# EAGLE board Openbook board (EAGLE 9.7.0)
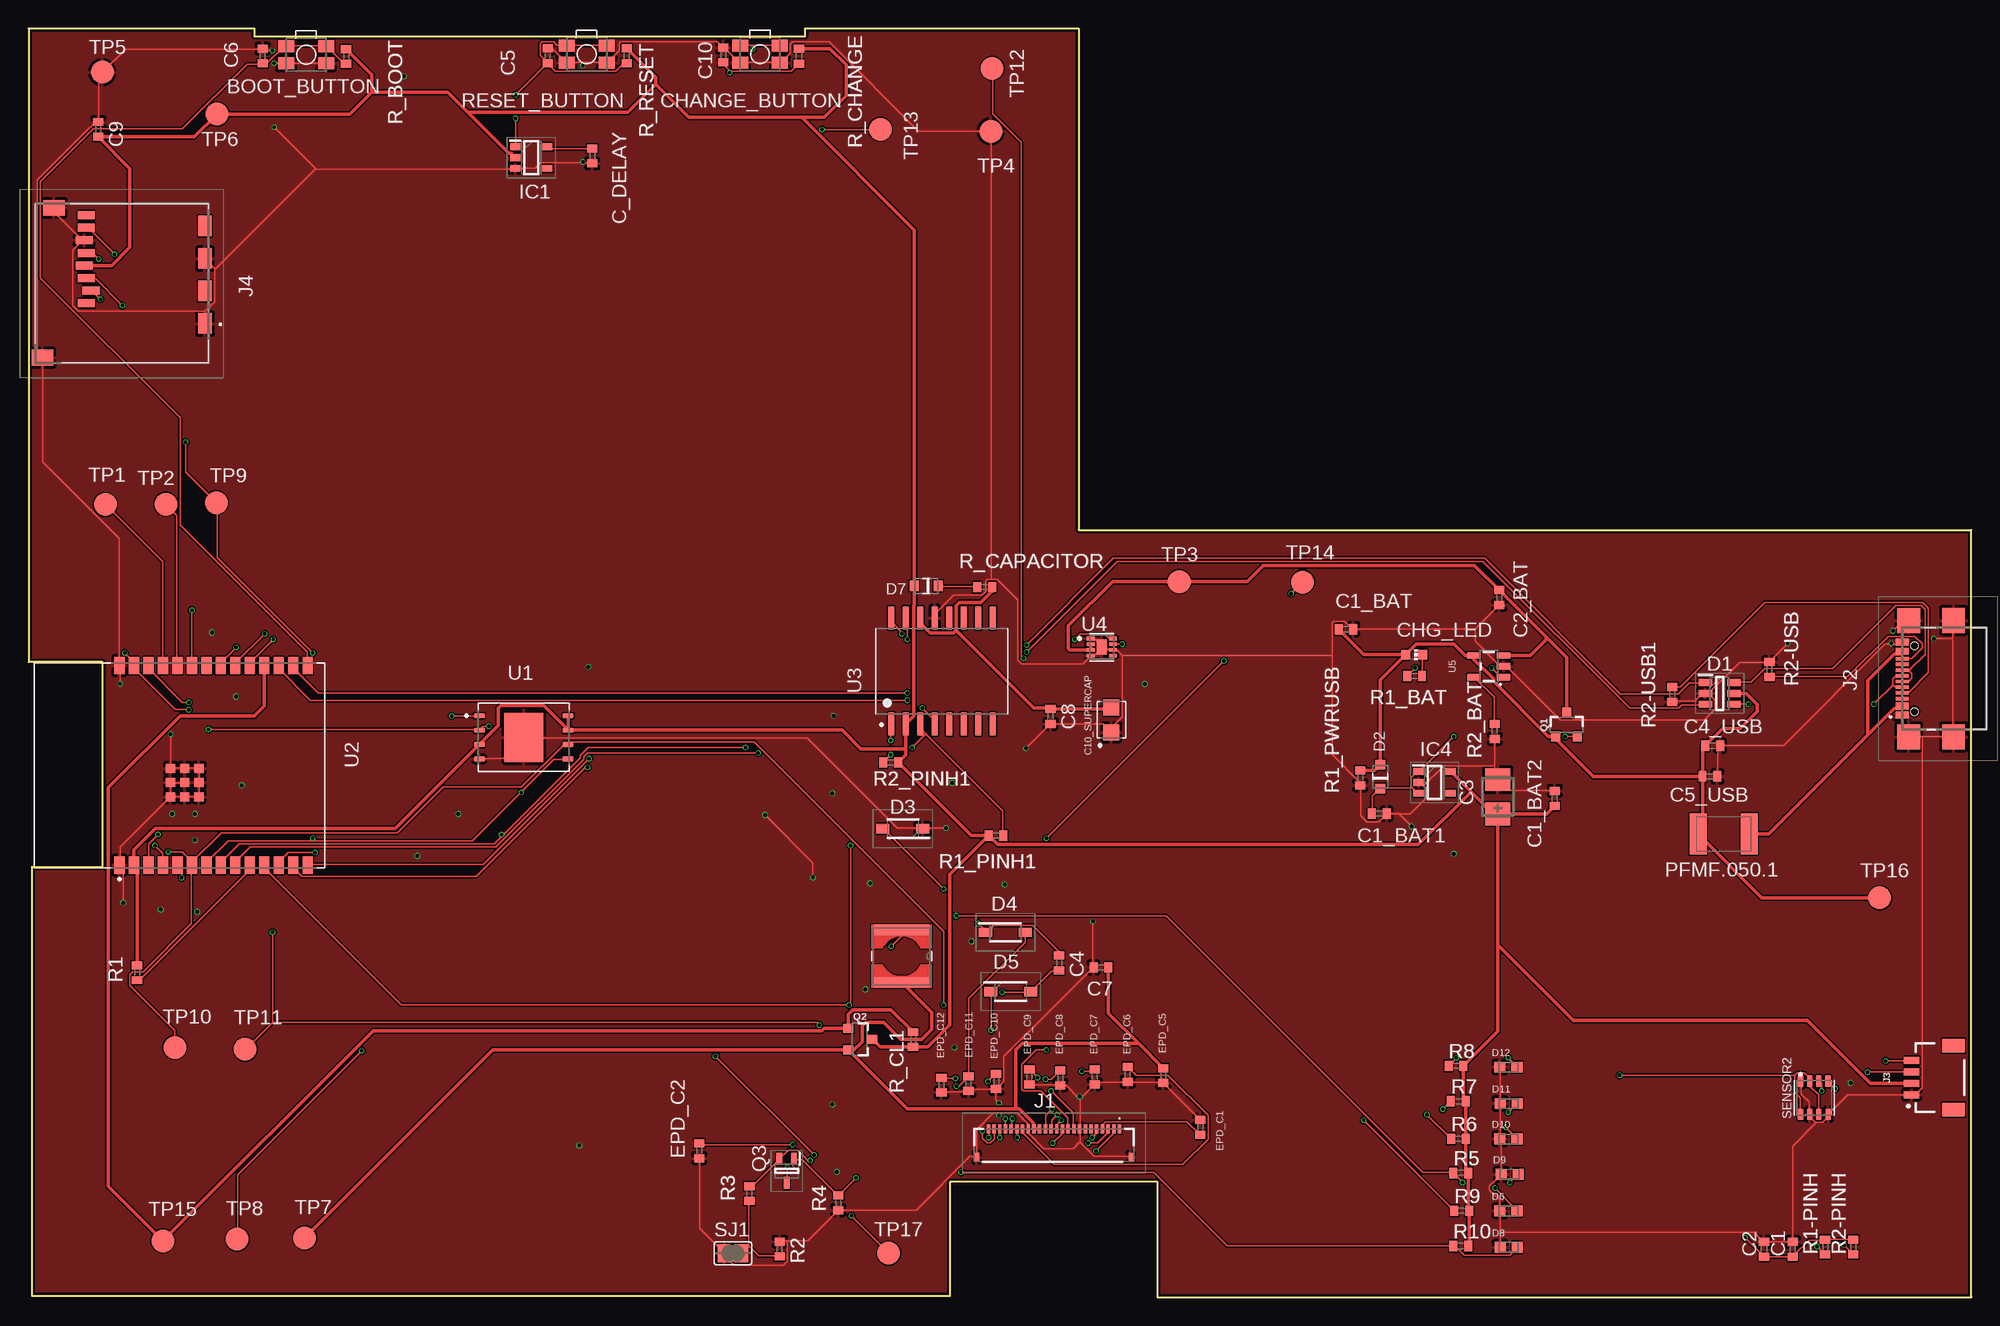
[diagram p0: board, top side]
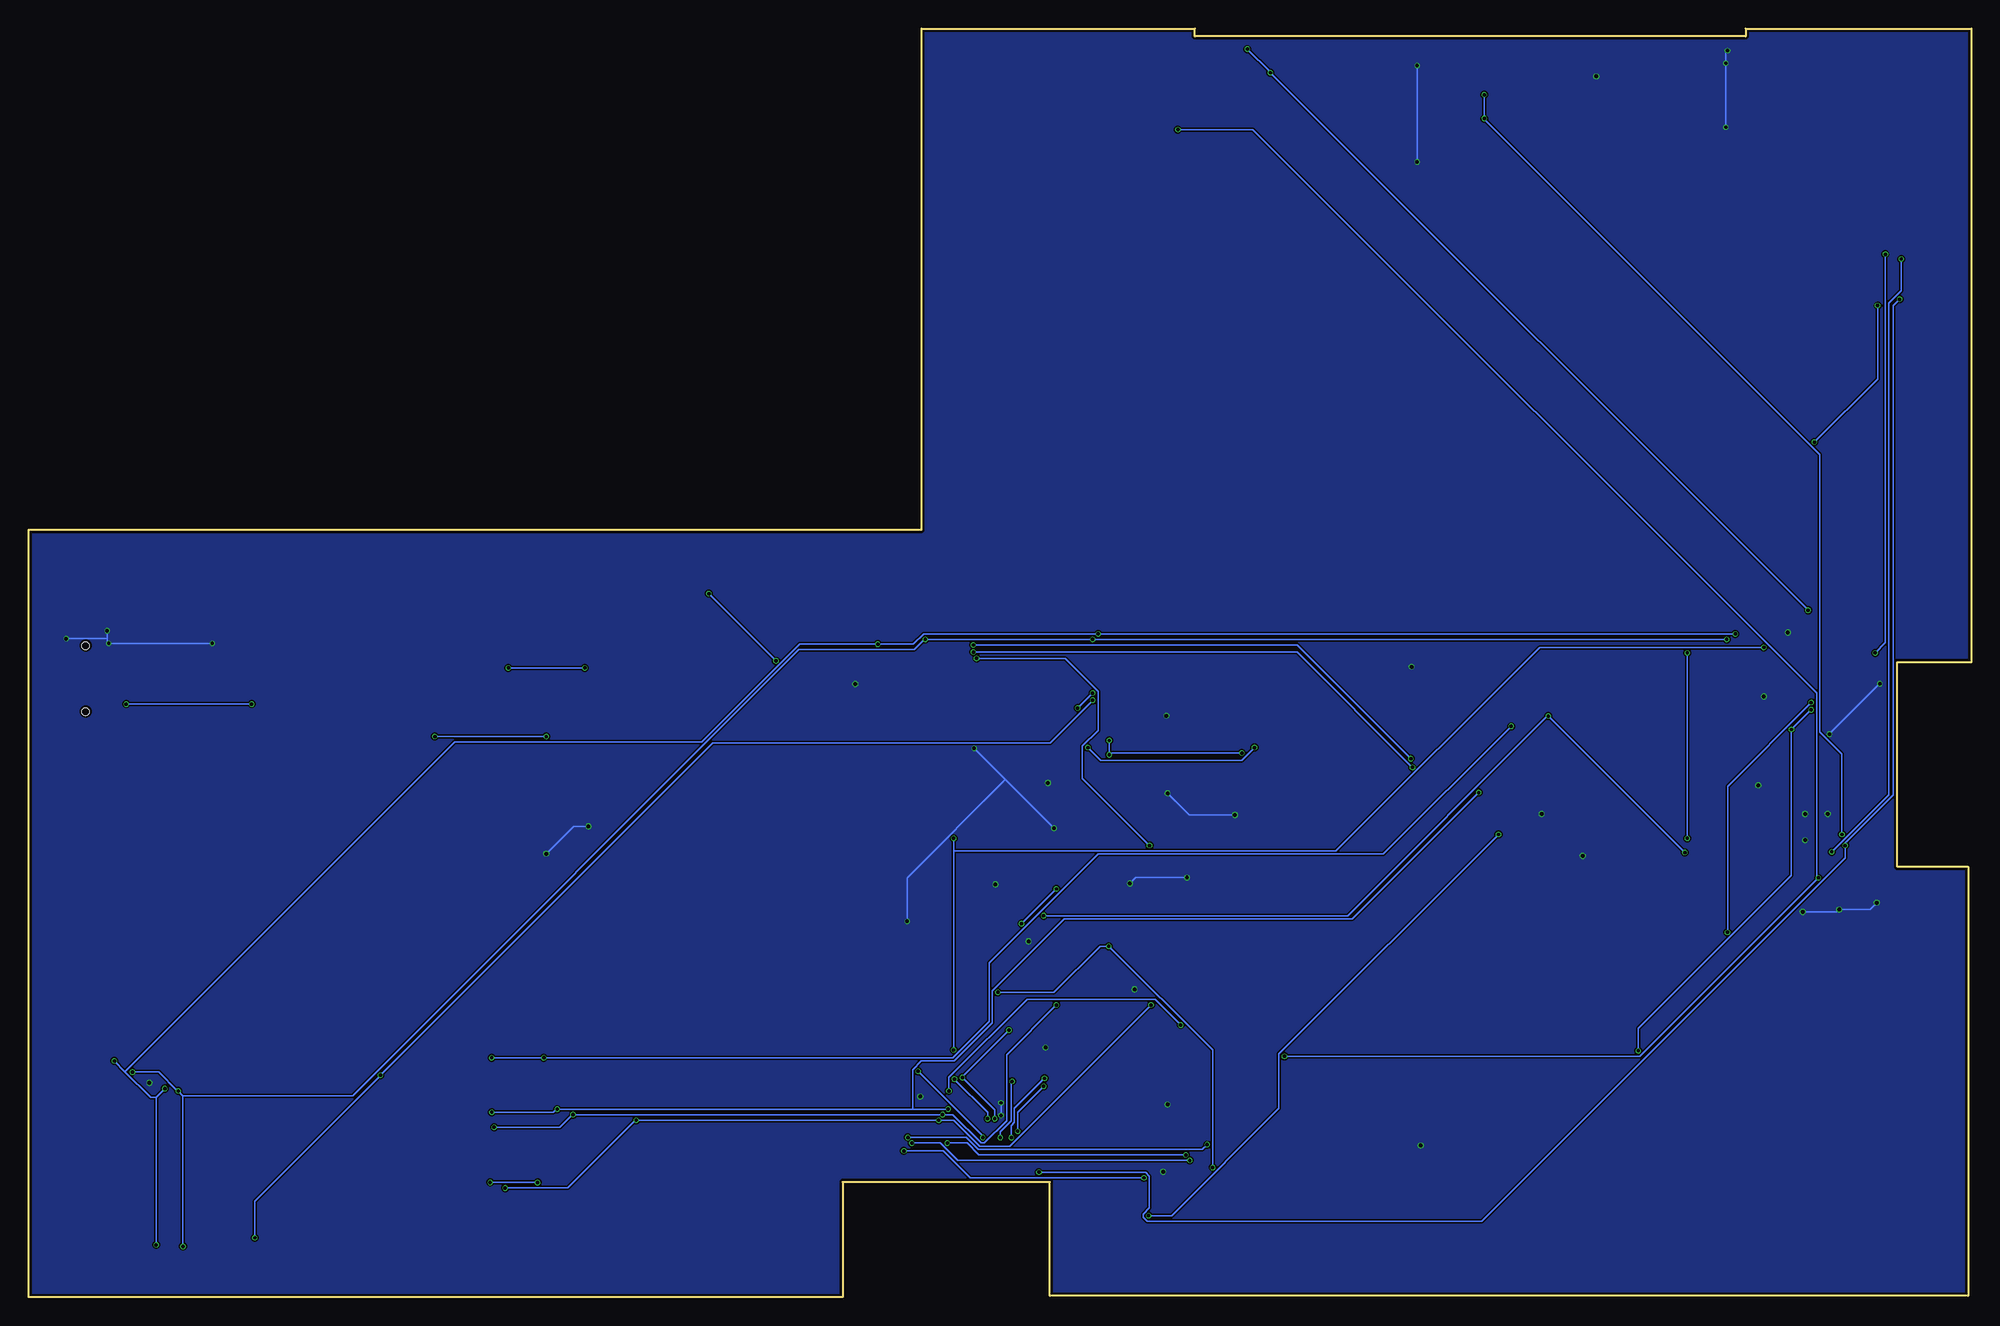
[diagram p1: board, bottom side, seen from below]

Size 170.4 x 111.3 mm. Coordinates in mm from the lower left corner, seen from the top.
Outline: 0.3,0.1 80.83,0.1 80.83,10.1 99,10.1 99,0 170.4,0 170.4,67.3 92.1,67.3 92.1,111.3 68.1,111.3 68.1,110.6 19.8,110.6 19.8,111.3 0,111.3 0,55.7 6.5,55.7 6.5,37.74 0.3,37.74 0.3,0.1
Copper layers (1*16): Top 0.035mm / dielectric 1.6mm / Bottom 0.035mm
Design rules "jlcpcb-2layers.dru": minimum track width 5mil, minimum drill 0.3mm, track to track 5mil, track to pad 5mil, pad to pad 5mil, via to via 5mil, smd to smd 5mil, copper to edge 0.2mm, drill to drill 6mil, minimum pad ring 10mil, minimum via ring 3mil, stop-mask expansion 4mil, vias tented up to drill 0mil, thermal gap 10mil
Net classes: 0 default: width 0.15 mm; 1 POWER: width 0.3 mm

## Footprints (pad centres in the part's own frame; a part is rotated, then mirrored left to right if it is on the bottom)
MYBUTTON = smd 1.4 x 1.05: 1 1.75,0.75; 2 -1.75,0.75; 3 -1.75,-0.75; 4 1.75,-0.75
EAGLE-LTSPICE_C0402 = smd 0.7 x 0.9: 1 -0.65,0; 2 0.65,0
ESP32_WROVER_EAGLE-LTSPICE_C0402 = smd 0.7 x 0.9: 1 -0.65,0; 2 0.65,0
RCL_CT3528 = smd 2 x 2.2: + -1.5,0; - 1.5,0
CAPCP3225X100N = smd 1.4 x 1.4: 1 -1.1,0; 2 1.1,0
ADAFRUIT_CHIP-LED0603 = smd 0.8 x 0.8: A 0,-0.75; C 0,0.75
SOT95P280X145-6N = smd 1.2 x 0.6: 1 -1.25,0.95; 2 -1.25,0; 3 -1.25,-0.95; 4 1.25,-0.95; 5 1.25,0; 6 1.25,0.95
ESP32_WROVER_AVX---SD0805S020S1R0_AVX_SD0805S020S1R0_0 = smd 0.8 x 0.9: 1 -1.05,0; 2 1.05,0
SOD3716X135N = smd 1.15 x 0.8: 1 -1.75,0; 2 1.75,0
DIOC1608X36N = smd 0.97 x 0.94: 1 -0.75,0; 2 0.75,0
SOT95P280X125-5N = smd 0.9 x 0.6: 1 -1.4,0.95; 2 -1.4,0; 3 -1.4,-0.95; 4 1.4,-0.95; 5 1.4,0.95
SOT95P280X120-5N = smd 0.9 x 0.6: 1 -1.4,0.95; 2 -1.4,0; 3 -1.4,-0.95; 4 1.4,-0.95; 5 1.4,0.95
FH34SRJ24S05SH99 = smd 0.3 x 0.8: 1 5.75,1.45; 2 5.25,1.45; 3 4.75,1.45; 4 4.25,1.45; 5 3.75,1.45; 6 3.25,1.45; 7 2.75,1.45; 8 2.25,1.45; 9 1.75,1.45; 10 1.25,1.45; 11 0.75,1.45; 12 0.25,1.45; 13 -0.25,1.45; 14 -0.75,1.45; 15 -1.25,1.45; 16 -1.75,1.45; 17 -2.25,1.45; 18 -2.75,1.45; 19 -3.25,1.45; 20 -3.75,1.45; 21 -4.25,1.45; 22 -4.75,1.45; 23 -5.25,1.45; 24 -5.75,1.45 | smd 0.4 x 0.8: MP1 6.75,-1.05; MP2 -6.75,-1.05
SAMACSYS_PARTS_USB4110GFA = smd 0.3 x 1.15: A1 -3.35,3.678; A4 -2.55,3.678; A5 -1.25,3.678; A6 -0.25,3.678; A7 0.25,3.678; A8 1.25,3.678; A9 2.55,3.678; A12 3.35,3.678; B1 3.05,3.678; B4 2.25,3.678; B5 1.75,3.678; B6 0.75,3.678; B7 -0.75,3.678; B8 -1.75,3.678; B9 -2.25,3.678; B12 -3.05,3.678 | smd 2.18 x 2: MP1 -5.11,-0.827; MP2 5.11,-0.827; MP3 -5.11,3.103; MP4 5.11,3.103 | hole 0.65: -2.89,2.603; 2.89,2.603
JST04_1MM_RA = smd 0.6 x 1.35: 1 -1.5,0; 2 -0.5,0; 3 0.5,0; 4 1.5,0 | smd 1.2 x 2: NC1 2.8,-3.675; NC2 -2.8,-3.675
112ATAARR03ATTEND = smd 1.8 x 1.2: G1 10.6,10.4; G2 4.9,10.4; S1 7.75,10.4; S2 2.05,10.4 | smd 1.4 x 1.9: G3 13.6,-3.85; G4 0.45,-2.85 | smd 0.7 x 1.5: P1 8.8,0; P2 7.7,0.4; P3 6.6,0; P4 5.5,-0.2; P5 4.4,0; P6 3.3,-0.2; P7 2.2,0; P8 1.1,0
IND_4828-WE-TPC_WRE = smd 0.889 x 4.826: 1 -2.286,0; 2 2.286,0
ESP32C6_VARISTOR_CT/CN1812 = smd 1.5 x 3.6: 1 -2.25,0; 2 2.25,0
ESP32_WROVER_SPARKFUN-DISCRETESEMI_SOT23-3 = smd 0.8 x 0.9: 1 -0.95,-1; 2 0.95,-1; 3 0,1.1
SOT65P210X110-3N = smd 1.05 x 0.5: 1 -1.05,0.65; 2 -1.05,-0.65; 3 1.05,0
ESP32_WROVER_EAGLE-LTSPICE_R0402 = smd 0.7 x 0.9: 1 -0.65,0; 2 0.65,0
ESP32_WROVER_BME680_PSON80P300X300X100-8N = smd 1.016 x 0.5: 1 1.458,1.2; 2 1.458,0.4; 3 1.458,-0.4; 4 1.458,-1.2; 5 -1.458,-1.22; 6 -1.458,-0.4; 7 -1.458,0.4; 8 -1.458,1.2
SJ = smd 1.168 x 1.6: 1 -0.762,0; 2 0.762,0
TP20R = smd 2 x 2: TP 0,0
SON127P600X800X80-9N = smd 0.94 x 0.44: 1 -3.895,1.905; 2 -3.895,0.635; 3 -3.895,-0.635; 4 -3.895,-1.905; 5 3.895,-1.905; 6 3.895,-0.635; 7 3.895,0.635; 8 3.895,1.905 | smd 3.4 x 4.3: 9 0,0
XCVR_ESP32-C6-WROOM-1-N8 = smd 1.5 x 0.9: 1 -8.75,5.26; 2 -8.75,3.99; 3 -8.75,2.72; 4 -8.75,1.45; 5 -8.75,0.18; 6 -8.75,-1.09; 7 -8.75,-2.36; 8 -8.75,-3.63; 9 -8.75,-4.9; 10 -8.75,-6.17; 11 -8.75,-7.44; 12 -8.75,-8.71; 13 -8.75,-9.98; 14 -8.75,-11.25; 15 8.75,-11.25; 16 8.75,-9.98; 17 8.75,-8.71; 18 8.75,-7.44; 19 8.75,-6.17; 20 8.75,-4.9; 21 8.75,-3.63; 22 8.75,-2.36; 23 8.75,-1.09; 24 8.75,0.18; 25 8.75,1.45; 26 8.75,2.72; 27 8.75,3.99; 28 8.75,5.26 | smd 0.8 x 0.8: 29_1 -2.755,0.79; 29_2 -1.505,0.79; 29_3 -0.255,0.79; 29_4 -2.755,-0.46; 29_5 -1.505,-0.46; 29_6 -0.255,-0.46; 29_7 -2.755,-1.71; 29_8 -1.505,-1.71; 29_9 -0.255,-1.71
SOIC127P1032X265-16N = smd 2.05 x 0.59: 1 -4.655,4.445; 2 -4.655,3.175; 3 -4.655,1.905; 4 -4.655,0.635; 5 -4.655,-0.635; 6 -4.655,-1.905; 7 -4.655,-3.175; 8 -4.655,-4.445; 9 4.655,-4.445; 10 4.655,-3.175; 11 4.655,-1.905; 12 4.655,-0.635; 13 4.655,0.635; 14 4.655,1.905; 15 4.655,3.175; 16 4.655,4.445
SON50P200X200X80-9N = smd 0.762 x 0.305: 1 -0.985,0.75; 2 -0.985,0.25; 3 -0.985,-0.25; 4 -0.985,-0.75; 5 0.985,-0.75; 6 0.985,-0.25; 7 0.985,0.25; 8 0.985,0.75 | smd 0.9 x 1.3: 9 0,0
ESP32_WROVER_SPARKFUN-IC-POWER_SOT23-5 = smd 0.55 x 1.2: 1 -0.95,-1.3; 2 0,-1.3; 3 0.95,-1.3; 4 0.95,1.3; 5 -0.95,1.3

## Placement (x,y rotation side)
BOOT_BUTTON  BUTTON_CUSYOMV1  [MYBUTTON]  24.35,108.99 180 top
C1  100nF  [EAGLE-LTSPICE_C0402]  154.72,4.2 90 top
C1_BAT  4.7uF  [EAGLE-LTSPICE_C0402]  115.54,58.59 0 top
C1_BAT1  4.7uF  [ESP32_WROVER_EAGLE-LTSPICE_C0402]  118.46,42.42 0 top
C1_BAT2  4.7uF  [EAGLE-LTSPICE_C0402]  133.86,43.76 90 top
C2  100nF  [EAGLE-LTSPICE_C0402]  152.2,4.2 90 top
C2_BAT  4.7uF  [EAGLE-LTSPICE_C0402]  128.99,61.37 270 top
C3  100uF TANT  [RCL_CT3528]  128.86,43.9 90 top
C4  4.7uF/25V  [EAGLE-LTSPICE_C0402]  90.38,29.32 270 top
C4_USB  100nF  [EAGLE-LTSPICE_C0402]  147.7,48.38 0 top
C5  1uF  [EAGLE-LTSPICE_C0402]  45.53,108.9 90 top
C5_USB  4.7uF  [EAGLE-LTSPICE_C0402]  147.46,45.69 0 top
C6  100nF  [EAGLE-LTSPICE_C0402]  20.55,108.88 90 top
C7  10uF  [EAGLE-LTSPICE_C0402]  94.06,28.92 180 top
C8  100nF  [EAGLE-LTSPICE_C0402]  89.63,50.95 270 top
C9  100nF  [EAGLE-LTSPICE_C0402]  6.11,102.45 270 top
C10  100nF  [EAGLE-LTSPICE_C0402]  60.93,108.98 90 top
C10_SUPERCAP  CPH3225A  [CAPCP3225X100N]  94.96,50.65 90 top
C_DELAY  100nF  [EAGLE-LTSPICE_C0402]  49.45,100.12 270 top
CHANGE_BUTTON  BUTTON_CUSYOMV1  [MYBUTTON]  64.15,109.05 180 top
CHG_LED  [ADAFRUIT_CHIP-LED0603]  121.52,56.36 270 top
D1  USBLC6-2SC6Y  [SOT95P280X145-6N]  148.32,52.96 0 top
D2  ESP32_WROVER_AVX---SD0805S020S1R0_AVX_SD0805S020S1R0_0_0AVX_SD0805S020S1R0_0_0  [ESP32_WROVER_AVX---SD0805S020S1R0_AVX_SD0805S020S1R0_0]  118.55,45.66 90 top
D3  MBR0530  [SOD3716X135N]  76.68,41.1 180 top
D4  MBR0530  [SOD3716X135N]  85.68,32 0 top
D5  MBR0530  [SOD3716X135N]  86.14,26.8 0 top
D6  PGB1010603MR  [DIOC1608X36N]  129.79,7.57 0 top
D7  ESP32_WROVER_AVX---SD0805S020S1R0_AVX_SD0805S020S1R0_0_0AVX_SD0805S020S1R0_0_0  [ESP32_WROVER_AVX---SD0805S020S1R0_AVX_SD0805S020S1R0_0]  78.73,62.4 180 top
D8  PGB1010603MR  [DIOC1608X36N]  129.81,4.37 0 top
D9  PGB1010603MR  [DIOC1608X36N]  129.91,10.78 0 top
D10  PGB1010603MR  [DIOC1608X36N]  129.79,13.88 0 top
D11  PGB1010603MR  [DIOC1608X36N]  129.81,16.99 0 top
D12  PGB1010603MR  [DIOC1608X36N]  129.79,20.19 0 top
EPD_C1  1uF/50V  [EAGLE-LTSPICE_C0402]  102.76,14.9 270 top
EPD_C2  1uF/50V  [EAGLE-LTSPICE_C0402]  58.82,12.84 90 top
EPD_C5  0.1uF/50V  [EAGLE-LTSPICE_C0402]  99.52,19.43 90 top
EPD_C6  1uF/50V  [EAGLE-LTSPICE_C0402]  96.4,19.54 90 top
EPD_C7  1uF/50V  [EAGLE-LTSPICE_C0402]  93.5,19.33 90 top
EPD_C8  1uF/50V  [EAGLE-LTSPICE_C0402]  90.48,19.24 90 top
EPD_C9  1uF/50V  [EAGLE-LTSPICE_C0402]  87.78,19.33 90 top
EPD_C10  1uF/50V  [EAGLE-LTSPICE_C0402]  84.86,18.94 90 top
EPD_C11  1uF/50V  [EAGLE-LTSPICE_C0402]  82.44,18.74 90 top
EPD_C12  1uF/50V  [EAGLE-LTSPICE_C0402]  80.06,18.6 90 top
IC1  BD5229G-TR  [SOT95P280X125-5N]  44.09,99.97 0 top
IC4  XC6220A331MR-G  [SOT95P280X120-5N]  123.31,45.16 0 top
J1  FH34SRJ-24S-0.5SH_99_  [FH34SRJ24S05SH99]  89.93,13.32 0 top
J2  SAMACSYS_PARTS_USB4110-GF-A  [SAMACSYS_PARTS_USB4110GFA]  168,54.26 90 top
J3  QWIIC_RIGHT_ANGLE  [JST04_1MM_RA]  165.15,19.26 90 top
J4  112A-TAAR-R03_ATTEND  [112ATAARR03ATTEND]  5.08,96.01 270 top
L1  68uH  [IND_4828-WE-TPC_WRE]  76.57,29.91 270 top
PFMF.050.1  ESP32C6_VARISTORCN1812  [ESP32C6_VARISTOR_CT/CN1812]  148.67,40.63 180 top
Q1  20V/4.2A/52mΩ/1.4W  [ESP32_WROVER_SPARKFUN-DISCRETESEMI_SOT23-3]  134.89,50.19 0 top
Q2  20V/4.2A/52mΩ/1.4W  [ESP32_WROVER_SPARKFUN-DISCRETESEMI_SOT23-3]  72.9,22.63 270 top
Q3  SI1308EDL-T1-GE3  [SOT65P210X110-3N]  66.49,11.07 270 top
R1  10K  [ESP32_WROVER_EAGLE-LTSPICE_R0402]  9.52,28.46 90 top
R1-PINH  10K  [ESP32_WROVER_EAGLE-LTSPICE_R0402]  157.56,4.4 90 top
R1_BAT  200  [ESP32_WROVER_EAGLE-LTSPICE_R0402]  121.56,54.49 180 top
R1_PINH1  10K  [ESP32_WROVER_EAGLE-LTSPICE_R0402]  84.85,40.49 180 top
R1_PWRUSB  100K  [ESP32_WROVER_EAGLE-LTSPICE_R0402]  116.8,45.56 90 top
R2  2.2  [ESP32_WROVER_EAGLE-LTSPICE_R0402]  65.89,4.22 270 top
R2-PINH  10K  [ESP32_WROVER_EAGLE-LTSPICE_R0402]  160.04,4.4 90 top
R2-USB  5k1  [ESP32_WROVER_EAGLE-LTSPICE_R0402]  152.68,55.06 90 top
R2-USB1  5K1  [ESP32_WROVER_EAGLE-LTSPICE_R0402]  144.15,52.88 90 top
R2_BAT  2K  [ESP32_WROVER_EAGLE-LTSPICE_R0402]  128.59,49.63 90 top
R2_PINH1  10K  [ESP32_WROVER_EAGLE-LTSPICE_R0402]  75.61,46.91 0 top
R3  0.47  [ESP32_WROVER_EAGLE-LTSPICE_R0402]  63.22,9.09 90 top
R4  10K  [ESP32_WROVER_EAGLE-LTSPICE_R0402]  71.02,8.27 90 top
R5  10k  [ESP32_WROVER_EAGLE-LTSPICE_R0402]  125.62,10.89 0 top
R6  10k  [ESP32_WROVER_EAGLE-LTSPICE_R0402]  125.41,13.89 0 top
R7  10k  [ESP32_WROVER_EAGLE-LTSPICE_R0402]  125.4,17.19 0 top
R8  10k  [ESP32_WROVER_EAGLE-LTSPICE_R0402]  125.19,20.29 0 top
R9  10k  [ESP32_WROVER_EAGLE-LTSPICE_R0402]  125.69,7.58 0 top
R10  10k  [ESP32_WROVER_EAGLE-LTSPICE_R0402]  125.6,4.48 0 top
R_BOOT  10K  [ESP32_WROVER_EAGLE-LTSPICE_R0402]  27.85,108.84 90 top
R_CAPACITOR  15  [ESP32_WROVER_EAGLE-LTSPICE_R0402]  83.85,62.29 0 top
R_CHANGE  10K  [ESP32_WROVER_EAGLE-LTSPICE_R0402]  67.57,108.88 90 top
R_CL1  10K  [ESP32_WROVER_EAGLE-LTSPICE_R0402]  77.58,22.6 270 top
R_RESET  10K  [ESP32_WROVER_EAGLE-LTSPICE_R0402]  52.47,108.91 90 top
RESET_BUTTON  BUTTON_CUSYOMV1  [MYBUTTON]  48.95,109.05 180 top
SENSOR2  BME688  [ESP32_WROVER_BME680_PSON80P300X300X100-8N]  156.61,17.5 90 top
SJ1  [SJ]  61.78,3.84 0 top
TP1  TPTP20R  [TP20R]  6.74,69.55 0 top
TP2  TPTP20R  [TP20R]  12.04,69.57 0 top
TP3  TPTP20R  [TP20R]  100.92,62.77 0 top
TP4  TPTP20R  [TP20R]  84.4,102.27 0 top
TP5  TPTP20R  [TP20R]  6.48,107.47 0 top
TP6  TPTP20R  [TP20R]  16.54,103.79 0 top
TP7  TPTP20R  [TP20R]  24.22,5.19 0 top
TP8  TPTP20R  [TP20R]  18.3,5.09 0 top
TP9  TPTP20R  [TP20R]  16.48,69.69 0 top
TP10  TPTP20R  [TP20R]  12.84,21.91 0 top
TP11  TPTP20R  [TP20R]  18.99,21.75 0 top
TP12  TPTP20R  [TP20R]  84.51,107.81 270 top
TP13  TPTP20R  [TP20R]  74.71,102.46 270 top
TP14  TPTP20R  [TP20R]  111.74,62.73 0 top
TP15  TPTP20R  [TP20R]  11.79,4.93 0 top
TP16  TPTP20R  [TP20R]  162.34,35.03 0 top
TP17  TPTP20R  [TP20R]  75.44,3.85 0 top
U1  W25Q512JVEIQ  [SON127P600X800X80-9N]  43.43,49.11 0 top
U2  ESP32-C6-WROOM-1-N8  [XCVR_ESP32-C6-WROOM-1-N8]  13.24,46.65 90 top
U3  DS3231SN#  [SOIC127P1032X265-16N]  80.1,54.93 90 top
U4  MAX17048G+T10  [SON50P200X200X80-9N]  94.13,57.03 0 top
U5  ESP32_WROVER_SPARKFUN-IC-POWER_MCP73831  [ESP32_WROVER_SPARKFUN-IC-POWER_SOT23-5]  128.06,55.34 90 top

## Library data of the parts
BOOT_BUTTON CHANGE_BUTTON CHG_LED PFMF.050.1 RESET_BUTTON SJ1 TP1-TP17 = DeskAssistant v19 v1
C1 C1_BAT C1_BAT1 C1_BAT2 C2 C2_BAT C4 C4_USB C5 C5_USB C6-C10 C_DELAY EPD_C1 EPD_C2 EPD_C5-EPD_C12 = DeskAssistant v19 v1; SPICEMODEL: NONE; SPICEPREFIX: C
C3 = DeskAssistant v19 v1; SPICEPREFIX: C
C10_SUPERCAP = DeskAssistant v19 v1; AVAILABILITY: Not in stock; CHECK_PRICES: https://www.snapeda.com/parts/CPH3225A/Seiko+Instruments/view-part/?ref=eda; DESCRIPTION: 11 mF (EDLC) Supercapacitor 3.3 V 1210 (3225 Metric) - -; MF: Seiko Instruments; MP: CPH3225A; PACKAGE: 1210 Seiko; PRICE: None; PURCHASE-URL: https://www.snapeda.com/api/url_track_click_mouser/?unipart_id=562593&manufacturer=Seiko Instruments&part_name=CPH3225A&search_term=None; SNAPEDA_LINK: https://www.snapeda.com/parts/CPH3225A/Seiko+Instruments/view-part/?ref=snap
D1 = DeskAssistant v19 v1; AVAILABILITY: In Stock; CHECK_PRICES: https://www.snapeda.com/parts/USBLC6-2SC6Y/STMicroelectronics/view-part/?ref=eda; DESCRIPTION: 17V Clamp 5A (8/20µs) Ipp Tvs Diode Surface Mount SOT-23-6; MF: STMicroelectronics; MP: USBLC6-2SC6Y; PACKAGE: SOT-23-6 STMicroelectronics; PRICE: None; SNAPEDA_LINK: https://www.snapeda.com/parts/USBLC6-2SC6Y/STMicroelectronics/view-part/?ref=snap
D2 D7 = DeskAssistant v19 v1; CENTROID_NOT_SPECIFIED: No; DATASHEET: http://datasheets.avx.com/schottky.pdf; DIGIKEY_DESCRIPTION: DIODE SCHOTTKY 20V 1A 0805; DIGIKEY_PART_NUMBER: 478-7800-1-ND; LEAD_FREE: yes; MF: AVX; MOUSER_PART_NUMBER: 581-SD0805S020S1R0; PACKAGE: 0805 (2012 metric); PREFIX: D; ROHS: yes; TEMPERATURE_RANGE_HIGH: +125°C; TEMPERATURE_RANGE_LOW: -55°C
D3-D5 = DeskAssistant v19 v1; AVAILABILITY: In Stock; CHECK_PRICES: https://www.snapeda.com/parts/MBR0530/Onsemi/view-part/?ref=eda; DESCRIPTION: Diode Schottky 30 V 500mA Surface Mount SOD-123; MF: ON Semiconductor; MP: MBR0530; PACKAGE: SOD-123-2 ON Semiconductor; PRICE: None; PURCHASE-URL: https://www.snapeda.com/api/url_track_click_mouser/?unipart_id=179458&manufacturer=ON Semiconductor&part_name=MBR0530&search_term=None; SNAPEDA_LINK: https://www.snapeda.com/parts/MBR0530/Onsemi/view-part/?ref=snap
D6 D8-D12 = DeskAssistant v19 v1; AVAILABILITY: In Stock; CHECK_PRICES: https://www.snapeda.com/parts/PGB1010603MR/Littelfuse/view-part/?ref=eda; DESCRIPTION: 150V (Typ) Clamp - Ipp Tvs Diode Surface Mount 0603 (1608 Metric); MF: Littelfuse Inc.; MP: PGB1010603MR; PACKAGE: 0603 Littelfuse Inc.; PRICE: None; PURCHASE-URL: https://www.snapeda.com/api/url_track_click_mouser/?unipart_id=5659453&manufacturer=Littelfuse Inc.&part_name=PGB1010603MR&search_term=None; SNAPEDA_LINK: https://www.snapeda.com/parts/PGB1010603MR/Littelfuse/view-part/?ref=snap
IC1 = DeskAssistant v19 v1; DESCRIPTION: Voltage Detector with Adjustable Delay Time: CMOS processes are utilized to develop high precision, low current consumption CMOS reset ICs that allow arbitrary setting of the delay time. The extensive lineup includes both Nch Open Drain and CMOS output types in a wide range of detection voltages (from 2.3V to 6.0V, in 0.1V steps), enabling selection of the ideal solution based on customer requirements. In addition, the entire series is of course both lead-free and RoHS-compliant.; HEIGHT: 1.25mm; MANUFACTURER_NAME: ROHM Semiconductor; MANUFACTURER_PART_NUMBER: BD5229G-TR; MOUSER_PART_NUMBER: 755-BD5229G-TR; MOUSER_PRICE-STOCK: https://www.mouser.co.uk/ProductDetail/ROHM-Semiconductor/BD5229G-TR?qs=4kLU8WoGk0vvnhrrYwdszw%3D%3D
IC4 = DeskAssistant v19 v1; DESCRIPTION: LDO Voltage Regulators; HEIGHT: 1.2mm; MANUFACTURER_NAME: Torex; MANUFACTURER_PART_NUMBER: XC6220A331MR-G; MOUSER_PART_NUMBER: 865-XC6220A331MR-G; MOUSER_PRICE-STOCK: https://www.mouser.co.uk/ProductDetail/Torex-Semiconductor/XC6220A331MR-G?qs=AsjdqWjXhJ8ZSWznL1J0gg%3D%3D
J1 = DeskAssistant v19 v1; DESCRIPTION: 24 Position FFC, FPC Connector Contacts, Top and Bottom 0.020" (0.50mm) Surface Mount, Right Angle; HEIGHT: 1.1mm; MANUFACTURER_NAME: Hirose; MANUFACTURER_PART_NUMBER: FH34SRJ-24S-0.5SH(99); MOUSER_PART_NUMBER: 798-FH34SRJ24S05SH99; MOUSER_PRICE-STOCK: https://www.mouser.co.uk/ProductDetail/Hirose-Connector/FH34SRJ-24S-0.5SH99?qs=vcbW%252B4%252BSTIpKBl5ap9J8Fw%3D%3D
J2 = DeskAssistant v19 v1; DESCRIPTION: CONN USB 2.0 TYPE-C R/A SMT; HEIGHT: 3.26mm; MANUFACTURER_NAME: GCT (GLOBAL CONNECTOR TECHNOLOGY); MANUFACTURER_PART_NUMBER: USB4110-GF-A; MOUSER_PART_NUMBER: 640-USB4110-GF-A; MOUSER_PRICE-STOCK: https://www.mouser.co.uk/ProductDetail/GCT/USB4110-GF-A?qs=KUoIvG%2F9IlYiZvIXQjyJeA%3D%3D
J3 = DeskAssistant v19 v1; PROD_ID: CONN-13694
J4 = DeskAssistant v19 v1; DESCRIPTION: Micro SD Card Socket, Push-Push Type, Top Mount, SMT, H=1.83mm, 10u; HEIGHT: 1.9mm; MANUFACTURER_NAME: ATTEND; MANUFACTURER_PART_NUMBER: 112A-TAAR-R03 ATTEND
L1 = DeskAssistant v19 v1; COPYRIGHT: Copyright (C) 2024 Ultra Librarian. All rights reserved.; MANUFACTURER_PART_NUMBER: 744043680; MFR_NAME: Wurth Electronics
Q1 Q2 = DeskAssistant v19 v1; PROD_ID: TRAN-14388
Q3 = DeskAssistant v19 v1; AVAILABILITY: In Stock; CHECK_PRICES: https://www.snapeda.com/parts/SI1308EDL-T1-GE3/Vishay+Siliconix/view-part/?ref=eda; DESCRIPTION: Si1308EDL-T1-GE3 N-channel MOSFET Transistor, 1.5 A, 30 V, 3-Pin SC-70 | Siliconix / Vishay SI1308EDL-T1-GE3; MF: Vishay Siliconix; MP: SI1308EDL-T1-GE3; PACKAGE: SOT-323 Vishay Semiconductor; PRICE: None; PURCHASE-URL: https://www.snapeda.com/api/url_track_click_mouser/?unipart_id=274603&manufacturer=Vishay Siliconix&part_name=SI1308EDL-T1-GE3&search_term=None; SNAPEDA_LINK: https://www.snapeda.com/parts/SI1308EDL-T1-GE3/Vishay+Siliconix/view-part/?ref=snap
R1 R1-PINH R1_BAT R1_PINH1 R1_PWRUSB R2 R2-PINH R2-USB R2-USB1 R2_BAT R2_PINH1 R3-R10 R_BOOT R_CAPACITOR R_CHANGE R_CL1 R_RESET = DeskAssistant v19 v1; SPICEMODEL: NONE; SPICEPREFIX: R
SENSOR2 = DeskAssistant v19 v1; AVAILABILITY: Unavailable; DESCRIPTION: Integrated Environmental Unit; MF: Bosch Sensortec; MP: BME680; PACKAGE: LGA-8 Bosch Tools; PRICE: None
U1 = DeskAssistant v19 v1; AVAILABILITY: In Stock; CHECK_PRICES: https://www.snapeda.com/parts/W25Q512JVEIQ/Winbond+Electronics/view-part/?ref=eda; DESCRIPTION: FLASH - NOR Memory IC 512Mb (64M x 8) SPI - Quad I/O 133 MHz 8-WSON (8x6); MF: Winbond Electronics; MP: W25Q512JVEIQ; PACKAGE: Package; PRICE: None; SNAPEDA_LINK: https://www.snapeda.com/parts/W25Q512JVEIQ/Winbond+Electronics/view-part/?ref=snap
U2 = DeskAssistant v19 v1; AVAILABILITY: In Stock; CHECK_PRICES: https://www.snapeda.com/parts/ESP32-C6-WROOM-1-N8/Espressif+Systems/view-part/?ref=eda; DESCRIPTION: Multiprotocol Modules ESP32-C6 module, Wi-Fi 6 in 2.4 GHz band, Bluetooth 5, Zigbee 3.0 and Thread. ESP34-WROOM Compatible - ENGINEERING SAMPLE; MF: Espressif Systems; MP: ESP32-C6-WROOM-1-N8; PACKAGE: None; PRICE: None; SNAPEDA_LINK: https://www.snapeda.com/parts/ESP32-C6-WROOM-1-N8/Espressif+Systems/view-part/?ref=snap
U3 = DeskAssistant v19 v1; AVAILABILITY: In Stock; CHECK_PRICES: https://www.snapeda.com/parts/DS3231SN%23/Analog+Devices/view-part/?ref=eda; DESCRIPTION: Extremely Accurate I²C-Integrated RTC/TCXO/Crystal; MF: Analog Devices; MP: DS3231SN#; PACKAGE: SOIC-16 Maxim; PRICE: None; PURCHASE-URL: https://www.snapeda.com/api/url_track_click_mouser/?unipart_id=99048&manufacturer=Analog Devices&part_name=DS3231SN#&search_term=None; SNAPEDA_LINK: https://www.snapeda.com/parts/DS3231SN%23/Analog+Devices/view-part/?ref=snap
U4 = DeskAssistant v19 v1; AVAILABILITY: In Stock; CHECK_PRICES: https://www.snapeda.com/parts/MAX17048G+T10/Analog+Devices/view-part/?ref=eda; DESCRIPTION: 3µA 1-Cell/2-Cell Fuel Gauge with ModelGauge; MF: Analog Devices; MP: MAX17048G+T10; PACKAGE: TDFN-8 Maxim; PRICE: None; PURCHASE-URL: https://www.snapeda.com/api/url_track_click_mouser/?unipart_id=329239&manufacturer=Analog Devices&part_name=MAX17048G+T10&search_term=None; SNAPEDA_LINK: https://www.snapeda.com/parts/MAX17048G+T10/Analog+Devices/view-part/?ref=snap
U5 = DeskAssistant v19 v1; PROD_ID: IC-09995

## Nets
3V3 [POWER]: C1_BAT2.1 C3.+ C9.2 D7.2 IC1.2 IC4.5 J3.2 J4.P4 Q2.3 R1.2 R1_PINH1.2 R2_PINH1.2 R5.2 R6.2 R7.2 R8.2 R9.2 R10.2 R_BOOT.2 R_CHANGE.2 R_CL1.2 R_RESET.2 TP6.TP U1.3 U1.7 U1.8 U2.2 U3.2
32KHZ: R2_PINH1.1 U2.9 U3.1
DN: D1.4 J2.A7 J2.B7
DP: D1.6 J2.A6 J2.B6
EPD_3V3 [POWER]: C7.1 EPD_C5.2 J1.15 J1.16 L1.2 Q2.2 TP7.TP
EPD_3V3_C [POWER]: Q2.1 R_CL1.1 TP15.TP U2.18
EPD_BUSY: J1.9 TP11.TP U2.26
EPD_CS: D6.2 J1.12 R9.1 TP12.TP U2.11
EPD_DC: J1.11 TP13.TP U2.5
EPD_RST: J1.10 TP14.TP U2.21
FLASH_CS: D9.2 R5.1 U1.1 U2.12
GDR: J1.2 Q3.1 R4.2
GND: BOOT_BUTTON.1 BOOT_BUTTON.2 C1.2 C1_BAT1.2 C1_BAT2.2 C1_BAT.2 C2.2 C2_BAT.2 C3.- C4_USB.2 C5.2 C5_USB.2 C6.2 C7.2 C8.2 C9.1 C10.2 C10_SUPERCAP.1 C_DELAY.2 CHANGE_BUTTON.1 CHANGE_BUTTON.2 D1.2 D3.1 D6.1 D8.1 D9.1 D10.1 D11.1 D12.1 EPD_C1.1 EPD_C2.1 EPD_C5.1 EPD_C6.1 EPD_C7.1 EPD_C8.1 EPD_C9.1 EPD_C10.1 EPD_C11.1 EPD_C12.1 IC1.3 IC4.2 J1.8 J1.17 J1.MP1 J1.MP2 J2.A1 J2.A12 J2.B1 J2.B12 J2.MP1 J2.MP2 J2.MP3 J2.MP4 J3.1 J4.G1 J4.G2 J4.G3 J4.G4 J4.P6 R1_PWRUSB.1 R2-USB1.1 R2-USB.2 R2.1 R2_BAT.1 R4.1 RESET_BUTTON.1 RESET_BUTTON.2 SENSOR2.1 SENSOR2.5 SENSOR2.7 SJ1.1 TP4.TP TP5.TP U1.4 U1.9 U2.1 U2.28 U2.29_1 U2.29_2 U2.29_3 U2.29_4 U2.29_5 U2.29_6 U2.29_7 U2.29_8 U2.29_9 U3.13 U4.1 U4.4 U4.6 U4.9 U5.2
GPIO8: R1.1 U2.10
I2C_PW: C1.1 C2.1 R1-PINH.2 R2-PINH.2 SENSOR2.2 SENSOR2.6 SENSOR2.8 U2.17
INT_RTC: R1_PINH1.1 TP17.TP U2.8 U3.3
IO/BOOT: BOOT_BUTTON.3 BOOT_BUTTON.4 C6.1 R_BOOT.1 U2.15
IO/CHANGE: C10.1 CHANGE_BUTTON.3 CHANGE_BUTTON.4 R_CHANGE.1 U2.23
MISO: D12.2 J4.P7 R8.1 TP8.TP U1.2 U2.27
MOSI: D11.2 J1.14 J4.P3 R7.1 TP9.TP U1.5 U2.7
N$1: J2.A5 R2-USB1.2
N$2: J2.B5 R2-USB.1
N$3: C_DELAY.1 IC1.5
N$4: R1_BAT.2 U5.1
N$5: C1_BAT1.1 D2.1 IC4.1 IC4.3 Q1.2
N$6: C4.1 D3.2 D4.1
N$7: CHG_LED.C R1_BAT.1
N$8: R2_BAT.2 U5.5
N$10: EPD_C12.2 J1.24
N$12: EPD_C10.2 J1.22
N$14: EPD_C8.2 J1.20
N$15: EPD_C7.2 J1.19
N$16: EPD_C6.2 J1.18
N$20: EPD_C2.2 J1.5
N$21: EPD_C1.2 J1.4
N$22: D7.1 R_CAPACITOR.1
PREVGH: D5.1 EPD_C9.2 J1.21
PREVGL: D4.2 EPD_C11.2 J1.23
RESE: J1.3 Q3.2 R3.2
RESE': R2.2 R3.1 SJ1.2
RESET: C5.1 IC1.1 R_RESET.1 RESET_BUTTON.3 RESET_BUTTON.4 U2.3
RTC_RST: U2.16 U3.4
RX: TP2.TP U2.24
SCK: D10.2 J1.13 J4.P5 R6.1 TP10.TP U1.6 U2.6
SCL: J3.4 R2-PINH.1 SENSOR2.4 U2.20 U3.16 U4.7
SDA: J3.3 R1-PINH.1 SENSOR2.3 U2.19 U3.15 U4.8
SRC: C4.2 D5.2 L1.1 Q3.3
SS_SD: D8.2 J4.P2 R10.1 U2.4
TX: TP1.TP U2.25
USB_D+: D1.1 U2.14
USB_D-: D1.3 U2.13
VBAT [POWER]: C2_BAT.1 Q1.3 TP3.TP U4.2 U4.3 U5.3
VBUS [POWER]: C1_BAT.1 C4_USB.1 C5_USB.1 CHG_LED.A D1.5 D2.2 PFMF.050.1.2 Q1.1 R1_PWRUSB.2 TP16.TP U5.4
VRTC [POWER]: C8.1 C10_SUPERCAP.2 R_CAPACITOR.2 U3.14
VUSB [POWER]: J2.A4 J2.A9 J2.B4 J2.B9 PFMF.050.1.1

## Tracks (layer width: path | path; a pad name or v marks a point on that pad's centre or on a via)
3V3
  Top 0.3: J4.P4 7.31,90.51 8.9,92.1 8.9,99.01 C9.2 14.55,101.8 TP6.TP 28.19,103.79 30.1,105.7 | 30.1,105.7 30.1,107.24 R_BOOT.2 | IC1.2 42.32,100.34 42.12,100.34 38.53,103.93 | 30.1,105.7 36.77,105.7 38.53,103.93 | 38.53,103.93 52.53,103.93 55,106.4 | 55,106.4 55,107.03 R_RESET.2 | 55,106.4 57.9,103.5 67.8,103.5 | 67.8,103.5 69.8,103.5 71.7,105.4 71.7,108.1 70.27,109.53 R_CHANGE.2 | 67.8,103.5 77.68,93.62 D7.2 77.68,60.74 77.62,60.68 77.62,50.97 U3.2 76.92,48.1 | 76.92,48.1 76.92,47.58 R2_PINH1.2 82.68,40.49 R1_PINH1.2 | U1.7 U1.8 | U1.7 45.17,51.9 41.4,51.9 41.2,51.7 41.2,50.14 U1.3 32.16,41.1 11.1,41.1 9.25,39.25 U2.2 9.52,37.63 R1.2 | U1.7 71.36,49.75 73,48.1 76.92,48.1 | R1_PINH1.2 80.8,37.09 80.8,23.9 78.85,21.95 R_CL1.2 74.68,21.95 Q2.3 | C1_BAT2.1 133.15,42.4 C3.+ | C3.+ 128.42,42.4 126.51,44.31 | 126.51,44.31 IC4.5 | C3.+ 128.86,30.9 | 128.86,30.9 128.86,23.31 R8.2 125.84,17.4 R7.2 R6.2 126.06,11.1 R5.2 126.27,7.65 R9.2 126.34,4.57 R10.2 | 128.86,30.9 135.46,24.3 156,24.3 161.54,18.76 J3.2 | 126.51,44.31 121.9,39.7 84.99,39.7 R1_PINH1.2
32KHZ  (via drill 0.3)
  Top 0.15: v75.62,47.59 75,46.96 R2_PINH1.1 | v75.62,48.83 75.62,50.22 U3.1 | v63.99,47.72 49.03,47.72 48.68,47.38 48.68,47.17 41,39.48 19.46,39.48 18.14,38.17 18.14,37.96 U2.9
  Bottom 0.15: v75.62,48.83 v75.62,47.59 75.55,47.72 v63.99,47.72
DN  (via drill 0.3)
  Top 0.15: 163.53,53.72 163.5,53.75 163.5,54.23 163.71,54.44 164.26,54.44 J2.A7 | 163.53,53.72 163.71,53.54 164.26,53.54 J2.B7 | v150.83,52.02 D1.4 | 163.53,53.72 v161.84,52.02
  Bottom 0.15: v161.84,52.02 v150.83,52.02
DP
  Top 0.15: 164.92,54.96 164.88,55 164.33,55 J2.B6 | 164.92,54.96 165.16,54.72 165.16,54.3 164.88,54.03 164.33,54.03 J2.A6 | 164.92,54.96 166.34,56.38 166.34,60.33 165.99,60.67 163.78,60.67 158.24,55.14 152.28,55.14 151.1,53.96 149.58,53.96 D1.6
EPD_3V3
  Top 0.3: Q2.2 72.38,21.68 73.1,22.4 73.1,23.8 73.4,24.1 75,24.1 76.48,22.62 78.32,22.62 79.2,23.5 79.2,24.99 L1.2 | Q2.2 77.08,16.5 86.6,16.5 | 86.6,16.5 86.89,16.5 88.11,15.29 88.11,14.84 J1.16 J1.15 | 97.35,22.25 EPD_C5.2 | 97.35,22.25 94.71,24.89 C7.1 | 86.6,16.5 86.6,21.7 87.15,22.25 97.35,22.25 | Q2.2 40.71,21.68 TP7.TP
EPD_3V3_C
  Top 0.3: R_CL1.1 75.63,25.2 72.3,25.2 71.9,24.8 Q2.1 69.77,23.58 69.56,23.37 30.23,23.37 TP15.TP 7,9.72 7,44.7 13.3,51 19.8,51 20.68,51.88 U2.18
EPD_BUSY  (via drill 0.3)
  Top 0.15: v89.68,18.09 91.62,16.15 91.62,14.83 J1.9 | 21.4,24.11 69.11,24.11 v69.35,23.87 | 21.4,24.11 19.04,21.76 TP11.TP | v14.06,52.16 13.5,52.16 10.53,55.14 10.53,55.34 U2.26 | 21.4,24.11 v21.4,32.01
  Bottom 0.15: v89.68,18.09 89.68,19.26 82.82,26.12 71.6,26.12 v69.35,23.87 | v14.06,52.16 21.4,44.82 v21.4,32.01
EPD_CS  (via drill 0.3)
  Top 0.15: v90.58,15.52 90.23,15.18 90.23,14.83 J1.12 | v117.1,15.52 125,7.63 R9.1 | v128.6,9.57 130.54,7.63 D6.2 | U2.11 20.71,37.89 20.71,37.62 32.69,25.64 v71.95,25.64 71.95,25.7 72.09,25.84 v72.09,39.62 | v87.25,56.04 87.05,56.24 87.05,101.33 84.55,103.82 84.55,107.77 TP12.TP
  Bottom 0.15: v128.6,9.57 123.13,9.57 117.17,15.52 v117.1,15.52 v90.58,15.52 89.26,15.52 86.98,13.24 84.35,13.24 v71.95,25.64 | v87.25,56.04 79.5,56.04 76.59,53.13 76.59,49.73 77.97,48.35 77.97,45.51 v72.09,39.62
EPD_DC  (via drill 0.3)
  Top 0.15: v89.82,13.52 90.65,14.35 90.65,14.76 J1.11 | v60.25,21.13 v68.9,12.48 | v13.43,36.78 13.43,37.55 13.09,37.89 U2.5 | v69.6,102.43 74.65,102.43 TP13.TP
  Bottom 0.15: v89.82,13.52 88.09,13.52 87.05,12.48 v68.9,12.48 | v60.25,21.13 29.09,21.13 v13.43,36.78 13.43,36.85 13.57,36.99 13.57,52.99 63.02,102.43 v69.6,102.43
EPD_RST  (via drill 0.3)
  Top 0.15: v89.26,21.69 88.36,21.69 87.12,20.44 87.12,18.23 87.25,18.09 88.78,18.09 91.13,15.73 91.13,14.83 J1.10 | v104.84,55.83 v89.26,40.25 | v110.73,61.71 111.7,62.68 TP14.TP | v18.21,57 16.9,55.69 16.9,55.41 U2.21
  Bottom 0.15: v89.26,40.25 89.26,39.14 | 89.26,39.14 v89.26,21.69 | v110.73,61.71 v104.84,55.83 | v18.21,57 37.88,57 55.75,39.14 89.26,39.14
FLASH_CS  (via drill 0.3)
  Top 0.15: v125.76,10.05 125.76,10.12 125,10.89 R5.1 124.93,10.95 122.3,10.95 99.79,33.46 v81.37,33.46 | v129.91,10.05 130.61,10.75 D9.2 | v37.12,50.98 39.47,50.98 U1.1 | v25.14,39 22.78,39 21.95,38.17 21.95,37.96 U2.12
  Bottom 0.15: v129.91,10.05 v125.76,10.05 | v25.14,39 v37.12,50.98 37.19,50.98 54.71,33.46 v81.37,33.46
GDR  (via drill 0.3)
  Top 0.15: v93.63,12.82 95.15,14.35 95.15,14.76 J1.2 | v72.57,10.47 71.05,8.95 R4.2 70.98,8.95 67.86,12.06 67.17,12.06 Q3.1
  Bottom 0.15: v93.63,12.82 90.16,12.82 87.81,10.47 v72.57,10.47
GND  (via drill 0.3, 0.35)
  Top 0.15: BOOT_BUTTON.2 26.04,108.25 22.64,108.25 BOOT_BUTTON.1 22.58,108.25 v21.54,108.25 | v21.4,109.36 20.71,109.36 20.57,109.5 C6.2 20.5,109.5 8.52,109.5 6.51,107.49 TP5.TP 6.44,107.42 6.16,107.14 6.16,103.13 C9.1 6.09,103.06 5.82,103.06 0.76,98 0.76,82.83 1.18,82.42 J4.G3 1.25,82.35 1.25,73.28 7.96,66.56 7.96,55.41 U2.28 8.03,55.34 v8.03,53.82 | U2.29_1 12.46,43.92 12.46,45.09 U2.29_2 12.53,45.09 13.64,45.09 U2.29_5 | U2.29_1 12.53,43.92 13.64,43.92 U2.29_4 13.71,43.92 14.89,43.92 U2.29_7 14.96,43.92 14.96,45.09 U2.29_8 14.96,45.16 14.96,46.34 U2.29_9 14.89,46.41 13.71,46.41 U2.29_6 13.64,46.41 12.46,46.41 U2.29_3 12.46,46.48 v12.46,49.39 | U2.29_1 12.4,43.85 8.03,39.48 8.03,37.96 U2.1 8.3,37.58 v8.3,34.6 | C5.2 45.57,109.5 45.98,109.5 47.16,108.32 RESET_BUTTON.1 47.23,108.32 48.61,108.32 | 48.61,108.32 50.69,108.32 RESET_BUTTON.2 50.76,108.32 51.8,109.36 51.8,109.98 51.94,110.12 60.39,110.12 60.87,109.63 C10.2 60.94,109.57 61.08,109.57 62.39,108.25 CHANGE_BUTTON.1 62.46,108.32 65.86,108.32 CHANGE_BUTTON.2 65.93,108.25 66.83,109.15 66.83,109.91 67.03,110.12 70.22,110.12 78.05,102.3 84.35,102.3 TP4.TP 84.42,102.22 84.42,62.96 | J4.G4 2.29,95.51 2.29,95.16 4.71,92.74 4.85,92.74 J4.P6 4.71,92.67 3.88,91.84 3.88,86.99 4.36,86.51 15.51,86.51 | 48.61,99.52 49.44,99.52 C_DELAY.2 | 48.61,99.52 44.94,99.52 44.46,99.04 42.73,99.04 IC1.3 42.66,98.97 25.14,98.97 | 15.51,86.51 15.51,85.47 J4.G1 | 15.51,86.51 16.34,87.34 16.34,90.24 | 16.34,90.24 15.51,91.08 J4.G2 | 25.14,98.97 16.41,90.24 16.34,90.24 | v48.61,108.04 48.61,108.32 | v48.61,99.59 48.61,99.52
  Top 0.15: v21.54,102.64 25.14,99.04 25.14,98.97 | EPD_C12.1 80.12,18.02 82.34,18.02 82.41,18.09 EPD_C11.1 82.48,18.16 82.55,18.23 84.83,18.23 EPD_C10.1 | EPD_C10.1 84.9,18.29 85.52,18.92 85.52,21.13 87.05,22.66 87.12,22.66 93.35,28.89 C7.2 93.35,28.96 v93.35,32.98 | 66.55,4.93 68.35,4.93 70.98,7.56 R4.1 71.05,7.63 77.84,7.63 82.55,12.34 83.1,12.34 J1.MP2 83.17,12.34 83.17,14.69 84.62,16.15 85.11,16.15 | 66.55,4.93 65.93,4.93 R2.1 | EPD_C2.1 58.86,12.13 58.86,6.04 61.01,3.89 SJ1.1 61.08,3.82 61.08,3.61 61.91,2.78 66.2,2.78 66.55,3.13 66.55,4.93 | 85.11,16.15 86.7,16.15 87.67,15.18 87.67,14.83 J1.17 87.67,14.69 87.67,14.42 89.06,13.03 91.62,13.03 92.17,13.59 92.24,13.59 | EPD_C9.1 87.81,18.64 90.44,18.64 EPD_C8.1 90.51,18.57 91,18.57 92.17,17.39 92.24,17.39 | 92.24,17.39 92.24,14.83 J1.8 92.24,14.76 92.24,13.59 | 92.24,17.39 93.49,18.64 EPD_C7.1 93.56,18.71 93.69,18.85 96.4,18.85 EPD_C6.1 96.47,18.85 99.51,18.85 EPD_C5.1 102.7,15.59 EPD_C1.1 | 92.24,13.59 93.49,12.34 96.67,12.34 J1.MP1 | v85.11,17.05 84.83,17.33 84.83,18.16 EPD_C10.1 | 85.11,16.15 v85.11,15.94 | 129.08,5.69 129.08,4.38 D8.1 | 129.08,5.69 129.08,7.56 D6.1 129.01,7.63 129.01,8.53 128.11,9.43 128.11,9.71 129.15,10.75 D9.1 129.15,10.82 129.15,13.93 D10.1 129.08,13.93 129.08,16.98 D11.1 129.08,17.05 129.08,20.16 D12.1 | 156.71,15.32 156.23,15.8 156.23,16.01 SENSOR2.7 156.16,16.08 156.16,17.12 155.47,17.81 155.47,18.92 SENSOR2.1 | 156.71,15.32 157.34,15.32 157.82,15.8 157.82,16.01 SENSOR2.5 157.89,16.08 159.55,17.74 165.09,17.74 J3.1 165.16,17.81 165.51,17.81 166.06,18.36 166.06,49.18
  Top 0.15: 156.71,15.32 156.71,15.25 154.7,13.24 154.7,4.93 C1.2 154.7,4.86 152.21,4.86 C2.2 152.14,4.86 151.31,5.69 129.08,5.69 | U1.4 39.54,47.24 41.62,47.24 43.42,49.04 U1.9 43.49,49.04 68.28,49.04 76.17,41.15 78.39,41.15 D3.1 78.46,41.15 v80.47,41.15 | J2.B12 164.33,51.19 J2.A1 164.33,50.84 164.33,49.73 164.88,49.18 J2.MP3 164.95,49.18 166.06,49.18 | 166.06,49.18 168.76,49.18 J2.MP1 168.76,49.25 168.76,57.77 | 168.76,57.77 168.76,59.36 J2.MP2 | J2.A12 164.33,57.56 164.33,57.35 J2.B1 164.26,57.28 163.36,57.28 | C5_USB.2 148.13,45.72 148.13,48.14 148.33,48.35 C4_USB.2 148.4,48.42 153.94,48.42 162.81,57.28 163.36,57.28 | v163.5,58.46 164.4,59.36 164.88,59.36 J2.MP4 | v163.36,57.35 163.36,57.28 | v167.1,57.77 168.76,57.77 | U4.9 94.18,57 93.49,56.31 93.21,56.31 U4.4 93.14,56.24 92.45,55.55 87.12,55.55 86.77,55.9 86.77,61.16 84.97,62.96 84.42,62.96 | U4.9 94.25,57 94.46,56.8 95.08,56.8 U4.6 95.15,56.73 95.5,56.73 95.91,56.31 | U4.1 93.21,57.77 93.49,57.77 94.18,57.07 U4.9 | 95.91,56.31 95.91,50.91 94.8,49.8 C10_SUPERCAP.1 94.94,49.59 94.25,50.29 89.68,50.29 C8.2 89.61,50.29 v87.46,48.14 | 84.42,62.96 84.07,62.96 83.93,62.82 83.93,61.92 83.58,61.58 81.16,61.58 79.5,59.91 79.5,59.64 U3.13 | C1_BAT1.2 119.11,42.39 118.42,41.7 117.38,41.7 116.83,42.25 116.83,44.89 R1_PWRUSB.1 116.75,44.96 116.75,45.16 114.33,47.59 114.33,56.31 | 122.33,44.85 122.57,44.61 122.57,43.78 121.19,42.39 119.18,42.39 C1_BAT1.2 | 122.33,44.85 122.09,45.09 121.95,45.09 IC4.2 | 128.6,46.62 128.6,45.65 128.81,45.44 C3.- 128.87,45.37 129.77,44.47 133.79,44.47 C1_BAT2.2 | 128.6,46.62 R2_BAT.1
  Top 0.15: 122.33,44.85 124.1,46.62 128.6,46.62 | R2-USB1.1 144.18,52.3 146.12,52.3 146.74,52.92 147.02,52.92 D1.2 | D1.2 147.09,52.99 147.36,52.99 150.06,55.69 152.63,55.69 R2-USB.2 152.7,55.76 v154.29,57.35 | 126.87,58.6 C1_BAT.2 116.13,58.6 115.44,59.29 114.47,59.29 114.33,59.15 114.33,56.31 | 126.87,58.6 128.94,60.67 C2_BAT.2 | 126.87,58.6 126.87,57.56 129.08,55.34 U5.2 129.43,55.27 129.71,55.27 134.34,50.63 146.95,50.63 147.92,51.6 147.92,52.36 147.36,52.92 D1.2 | 114.33,56.31 95.91,56.31 | C1_BAT1.2 120.18,42.42 v121.3,41.3 | v64.6,42.3 68.8,38.1 v68.8,36.8
  Bottom 0.15: v21.4,109.36 21.54,109.22 v21.54,108.25 v21.54,102.64 | v8.03,53.82 v12.46,49.39 | v48.61,99.59 v48.61,108.04 | v85.11,15.94 v85.11,17.05 | 163.5,57.77 163.5,57.49 v163.36,57.35 v154.29,57.35 | 163.5,57.77 v163.5,58.46 | 163.5,57.77 v167.1,57.77 | v87.46,48.14 84.73,45.41 | 84.73,45.41 v80.47,41.15 | v93.35,32.98 93.35,36.78 84.73,45.41 | v121.3,41.3 122.6,41.3 v125,38.9 | v70.5,44.2 68.6,42.3 v64.6,42.3 | v68.8,36.8 73.3,36.8 v73.8,36.3 | v8.3,34.6 8.9,34 v11.6,34 11.8,33.8 v14.8,33.8
  other vias: 70.6,51 32.9,107.1 16.1,58.3 37.7,42.4 81,45.1 34.1,38.7 18.2,52.7 14.6,40.1 14.6,42.4 49.1,55.3 48.3,13.3 70.5,16.9 18.7,44.9 97.9,53.8 85.6,36.2 81.2,21.9 159.8,18.8 73.4,27 70.9,11 12.6,42.4 92.2,17.6 82.7,31.2
  pour Top: 80.76,10.16 80.78,10.18 99.02,10.18 99.04,10.16 99.06,10.14 99.08,10.12 99.08,0.08 170.32,0.08 170.32,67.22 92.08,67.22 92.06,67.24 92.04,67.26 92.02,67.28 92.02,111.22 68.18,111.22 68.18,110.58 68.16,110.56 68.14,110.54 68.12,110.52 19.78,110.52 19.76,110.54 19.74,110.56 19.72,110.58 19.72,111.22 0.08,111.22 0.08,55.78 6.52,55.78 6.54,55.76 6.56,55.74 6.58,55.72 6.58,37.68 6.56,37.66 6.54,37.64 6.52,37.62 0.38,37.62 0.38,0.18 80.72,0.18 80.72,10.12 80.74,10.14
  pour Bottom: 80.76,10.16 80.78,10.18 99.02,10.18 99.04,10.16 99.06,10.14 99.08,10.12 99.08,0.08 170.32,0.08 170.32,67.22 92.08,67.22 92.06,67.24 92.04,67.26 92.02,67.28 92.02,111.22 68.18,111.22 68.18,110.58 68.16,110.56 68.14,110.54 68.12,110.52 19.78,110.52 19.76,110.54 19.74,110.56 19.72,110.58 19.72,111.22 0.08,111.22 0.08,55.78 6.52,55.78 6.54,55.76 6.56,55.74 6.58,55.72 6.58,37.68 6.56,37.66 6.54,37.64 6.52,37.62 0.38,37.62 0.38,0.18 80.72,0.18 80.72,10.12 80.74,10.14
GPIO8
  Top 0.15: R1.1 9.56,27.85 9.76,27.85 19.39,37.48 19.39,37.89 U2.10
I2C_PW  (via drill 0.3)
  Top 0.15: R2-PINH.2 160.04,5.07 157.61,5.07 R1-PINH.2 157.54,5 156.16,5 154.77,3.61 C1.1 154.7,3.54 152.21,3.54 C2.1 152.14,3.61 v150.55,5.21 | 154.91,19.47 154.91,17.95 155.4,17.46 155.4,16.08 SENSOR2.8 | 154.91,19.47 155.12,19.68 155.74,19.68 156.16,19.26 156.16,18.99 SENSOR2.2 156.23,18.92 156.23,18.5 156.99,17.74 156.99,16.08 SENSOR2.6 | v77.08,52.36 24.72,52.36 21.95,55.14 21.95,55.34 U2.17 | 154.91,19.47 v139.54,19.47
  Bottom 0.15: v77.08,52.36 80.81,48.63 110.39,48.63 v139.54,19.47 139.54,19.4 150.55,8.39 v150.55,5.21
INT_RTC  (via drill 0.3)
  Top 0.15: 78.7,49.42 78.25,49.87 78.25,50.22 U3.3 | 78.7,49.42 85.45,42.67 85.45,40.52 R1_PINH1.1 | 41.59,40.49 48.41,47.31 48.41,47.52 49.1,48.21 v62.88,48.21 | 41.59,40.49 40.86,39.76 18.49,39.76 16.9,38.17 16.9,37.96 U2.8 | 78.7,49.42 v77.49,48.21 | v72.16,7.15 75.41,3.89 TP17.TP | 41.59,40.49 v41.48,40.59
  Bottom 0.15: v62.88,48.21 63.99,47.1 76.38,47.1 v77.49,48.21 | v72.16,7.15 70.15,7.15 60.73,16.56 60.73,21.34 v41.48,40.59
IO/BOOT
  Top 0.15: R_BOOT.1 27.84,108.25 27.63,108.25 26.11,109.77 BOOT_BUTTON.3 26.04,109.77 22.64,109.77 BOOT_BUTTON.4 22.58,109.7 22.37,109.7 20.91,108.25 20.57,108.25 C6.1 20.5,108.18 19.18,108.18 13.5,102.5 5.68,102.5 1.04,97.86 1.04,89.41 13.3,77.16 13.3,67.74 24.45,56.59 24.45,55.41 U2.15
IO/CHANGE  (via drill 0.3)
  Top 0.15: 63.5,109.84 65.86,109.84 CHANGE_BUTTON.3 | 63.5,109.84 62.46,109.84 CHANGE_BUTTON.4 | 61.56,107.56 60.94,108.18 C10.1 | 61.56,107.56 66.89,107.56 67.52,108.18 R_CHANGE.1 | v14.34,60.26 14.34,55.41 U2.23 | v61.49,107.42 61.56,107.49 61.56,107.56 | v63.5,109.5 63.5,109.84
  Bottom 0.15: v14.34,60.26 v61.49,107.42 61.49,107.49 v63.5,109.5
MISO  (via drill 0.3)
  Top 0.15: v125.2,21 125.2,20.93 124.58,20.3 R8.1 | v129.77,21 130.54,20.23 D12.2 | v15.79,49.8 39.47,49.8 U1.2 39.54,49.8 39.82,50.08 v40.37,50.08 | v14.06,51.53 12.88,51.53 9.28,55.14 9.28,55.34 U2.27 9.21,55.41 9.21,55.76 v8.45,56.52 | v7.55,91.49 5.26,93.78 5.12,93.78 J4.P7 | v29.22,21.62 18.35,10.75 18.35,5.14 TP8.TP
  Bottom 0.15: v129.77,21 v125.2,21 89.33,21 86.15,24.18 86.15,29.3 76.59,38.86 51.59,38.86 v40.37,50.08 | v14.06,51.53 v15.79,49.8 15.79,36.99 29.22,23.56 v29.22,21.62 | v7.55,91.49 7.55,57.42 v8.45,56.52
MOSI  (via drill 0.3)
  Top 0.15: v89.75,16.49 89.19,15.94 89.19,14.83 J1.14 | v124.03,16.49 124.72,17.19 R7.1 | v129.77,16.22 130.54,16.98 D11.2 | v8.24,86.99 5.89,89.34 5.12,89.34 J4.P3 | v13.78,75.01 13.78,72.38 16.41,69.75 TP9.TP 16.55,69.68 16.55,64.9 v24.93,56.52 | 43.18,44.3 38.92,40.04 24.93,40.04 | 43.18,44.3 46.05,47.17 47.3,47.17 U1.5 | 24.93,40.04 17.52,40.04 15.65,38.17 15.65,37.96 U2.7 | 24.93,40.04 v24.93,40.25 | v43.21,44.26 43.18,44.3
  Bottom 0.15: 92.86,16.49 v124.03,16.49 124.1,16.49 124.37,16.22 v129.77,16.22 | 92.86,16.49 v89.75,16.49 | v8.24,86.99 8.24,80.55 v13.78,75.01 | v24.93,40.25 v24.93,56.52 | 92.86,16.49 92.86,19.96 92.1,20.72 89.19,20.72 85.87,24.04 85.87,26.88 79.57,33.18 54.29,33.18 v43.21,44.26
N$1
  Top 0.15: R2-USB1.2 144.18,53.54 144.87,53.54 152.28,60.95 166.13,60.95 166.62,60.47 166.62,54.79 164.88,53.06 164.33,53.06 J2.A5
N$2
  Top 0.15: R2-USB.1 152.7,54.44 159.55,54.44 163.08,57.97 165.44,57.97 166.06,57.35 166.06,56.94 165.16,56.04 164.33,56.04 J2.B5
N$3
  Top 0.15: C_DELAY.1 45.64,100.77 45.5,100.91 IC1.5
N$4  (via drill 0.3)
  Top 0.15: v121.6,55.2 120.91,54.51 R1_BAT.2 | v128.32,55.2 129.08,54.44 129.36,54.44 U5.1
  Bottom 0.15: v128.32,55.2 v121.6,55.2
N$5  (via drill 0.3)
  Top 0.15: C1_BAT1.1 117.86,42.46 117.86,43.99 118.49,44.61 D2.1 118.56,44.68 121.26,44.68 121.29,44.71 | 121.29,44.71 121.26,44.75 121.26,45.58 121.74,46.06 121.88,46.06 IC4.1 121.95,46.13 v125,49.18 | 121.29,44.71 121.74,44.26 121.88,44.26 IC4.3 | v134.76,49.18 135.8,49.18 Q1.2
  Bottom 0.15: v125,49.18 v134.76,49.18
N$6  (via drill 0.3)
  Top 0.15: 84,32.08 D4.1 84,32.08 | 84,32.08 84.55,32.63 88.09,32.63 90.37,30.34 90.37,30 C4.1 | v80.26,35.81 75,41.08 D3.2 | 84,32.08 v83.31,32.77
  Bottom 0.15: v83.31,32.77 v80.26,35.81
N$7
  Top 0.15: CHG_LED.C 122.23,56.31 122.23,54.51 R1_BAT.1
N$8
  Top 0.15: R2_BAT.2 128.53,50.29 128.53,52.64 126.8,54.37 U5.5
N$10  (via drill 0.3)
  Top 0.15: v84.21,14 84.21,14.76 J1.24 | v81.3,19.19 80.12,19.19 EPD_C12.2
  Bottom 0.15: v84.21,14 84.21,15.04 83.93,15.32 83.93,16.56 v81.3,19.19
N$12  (via drill 0.3)
  Top 0.15: v85.18,14 J1.22 | v84.14,18.92 84.83,19.61 EPD_C10.2
  Bottom 0.15: v85.18,14 85.18,14.49 84.21,15.46 84.21,18.85 v84.14,18.92
N$14  (via drill 0.3)
  Top 0.15: v86.28,15.66 86.22,15.59 86.22,14.83 J1.20 | v89.19,19.12 89.68,19.12 90.44,19.89 EPD_C8.2
  Bottom 0.15: v86.28,15.66 86.28,16.22 v89.19,19.12
N$15  (via drill 0.3)
  Top 0.15: v86.7,14 86.7,14.76 J1.19 | v92.38,19.82 93.35,19.82 93.49,19.96 EPD_C7.2
  Bottom 0.15: v86.7,14 86.7,14.14 v92.38,19.82
N$16
  Top 0.15: J1.18 87.19,14.42 89.96,11.65 101.24,11.65 103.46,13.86 103.46,15.94 99.93,19.47 97.16,19.47 96.47,20.16 EPD_C6.2
N$20  (via drill 0.3)
  Top 0.15: v93.28,14 93.63,14.35 93.63,14.76 J1.5 | v67.03,13.38 58.93,13.38 58.86,13.45 EPD_C2.2
  Bottom 0.15: v93.28,14 88.16,14 87.12,12.96 67.45,12.96 v67.03,13.38
N$21
  Top 0.15: J1.4 94.18,15.11 94.46,15.39 101.59,15.39 102.7,14.28 EPD_C1.2
N$22
  Top 0.15: R_CAPACITOR.1 83.17,62.34 79.84,62.34 D7.1
PREVGH  (via drill 0.3)
  Top 0.15: v85.66,15.66 85.66,14.83 J1.21 | v88.5,19.26 87.81,19.96 EPD_C9.2 | v84.42,23.42 84.42,26.74 D5.1
  Bottom 0.15: v85.66,15.66 85.66,16.43 v88.5,19.26 88.5,19.33 v84.42,23.42
PREVGL  (via drill 0.3)
  Top 0.15: v83.65,14.55 83.65,13.93 84.07,13.52 84.35,13.52 84.69,13.86 84.69,14.76 J1.23 | v81.37,18.5 81.58,18.5 82.41,19.33 EPD_C11.2 82.48,19.4 82.48,26.19 87.39,31.11 87.39,31.94 D4.2
  Bottom 0.15: v83.65,14.55 83.65,16.22 v81.37,18.5
RESE  (via drill 0.3)
  Top 0.15: v92.93,13.52 93.76,13.52 94.67,14.42 94.67,14.76 J1.3 | v68.56,11.99 68.35,11.99 67.45,12.89 66.62,12.89 65.86,12.13 Q3.2 65.79,12.06 63.5,9.78 63.23,9.78 R3.2
  Bottom 0.15: v92.93,13.52 90.44,13.52 88.92,11.99 v68.56,11.99
RESE'
  Top 0.15: 63.16,4.44 63.16,8.39 R3.1 | 63.16,4.44 62.6,3.89 SJ1.2 | R2.2 65.86,3.61 64.06,3.61 63.23,4.44 63.16,4.44
RESET  (via drill 0.3)
  Top 0.15: RESET_BUTTON.3 50.69,109.84 47.23,109.84 RESET_BUTTON.4 47.16,109.84 46.33,109.84 46.05,110.12 45.01,110.12 44.87,109.98 44.87,108.94 45.5,108.32 C5.1 | v42.73,103.4 42.73,100.98 IC1.1 | v42.73,105.48 45.5,108.25 C5.1 | R_RESET.1 52.42,108.25 52.22,108.25 51.52,107.56 46.19,107.56 45.57,108.18 C5.1 | v11.36,40.59 10.53,39.76 10.53,37.96 U2.3
  Bottom 0.15: v42.73,105.48 v42.73,103.4 42.73,103.33 13.3,73.9 13.3,49.59 11.36,47.66 v11.36,40.59
RTC_RST  (via drill 0.3)
  Top 0.15: v77.08,52.99 25.41,52.99 23.27,55.14 23.27,55.34 U2.16 | v78.39,51.67 79.43,50.63 79.43,50.29 U3.4
  Bottom 0.15: v78.39,51.67 v77.08,52.99
RX
  Top 0.15: U2.24 13.02,55.41 13.02,68.57 12.05,69.54 TP2.TP
SCK  (via drill 0.3)
  Top 0.15: v90.23,16.01 89.75,15.52 89.75,14.83 J1.13 | v122.64,16.01 124.72,13.93 R6.1 | v129.57,14.9 130.54,13.93 D10.2 | U2.6 14.34,37.96 14.34,38.17 16.9,40.73 32.34,40.73 36.36,44.75 43.21,44.75 46.88,48.42 47.3,48.42 U1.6 47.37,48.49 47.58,48.7 63.64,48.7 80.26,32.08 v80.26,25.64 | v6.16,91.08 5.68,91.56 5.12,91.56 J4.P5 | v12.26,39.07 13.5,39.07 14.34,38.24 U2.6 | TP10.TP 12.81,21.96 12.81,23.42 8.86,27.37 8.86,28.27 9.14,28.54 10.04,28.54 14.27,32.77 14.27,37.89 U2.6
  Bottom 0.15: v129.57,14.9 123.82,14.9 122.71,16.01 v122.64,16.01 v90.23,16.01 89.33,16.01 86.84,13.52 86.56,13.52 84.62,15.46 84.62,21.27 v80.26,25.64 | v6.16,91.08 6.16,88.31 7.27,87.2 7.27,44.06 v12.26,39.07
SCL  (via drill 0.3)
  Top 0.15: v159.21,4.58 R2-PINH.1 | v158.44,18.29 157.82,18.92 SENSOR2.4 | v162.88,20.72 165.09,20.72 J3.4 | v95.91,57.28 95.15,57.28 U4.7 | v76.59,58.18 76.59,58.32 75.69,59.22 75.69,59.57 U3.16 | v20.71,58.18 18.14,55.62 18.14,55.41 U2.20
  Bottom 0.15: 159.21,17.53 v159.21,4.58 | v158.44,18.29 159.21,17.53 | 161.94,19.78 159.69,17.53 159.21,17.53 | 161.94,19.78 v162.88,20.72 | v20.71,58.18 v76.59,58.18 91.89,58.18 92.8,57.28 v95.91,57.28 102.77,57.28 111.35,48.7 133.03,48.7 161.94,19.78
SDA  (via drill 0.3)
  Top 0.15: v156.85,4.44 157.54,3.75 R1-PINH.1 | v157.27,18.09 157.27,18.71 157.06,18.92 SENSOR2.3 | v161.28,19.75 165.09,19.75 J3.3 | v91.76,57.7 92.24,58.18 94.39,58.18 94.73,57.84 95.08,57.84 U4.8 | v77.08,57.7 77.08,59.43 76.94,59.57 U3.15 | v21.47,57.7 19.46,55.69 19.46,55.41 U2.19
  Bottom 0.15: 156.85,17.67 v156.85,4.44 | 156.85,17.67 v157.27,18.09 157.34,18.09 159,19.75 v161.28,19.75 | v21.47,57.7 v77.08,57.7 v91.76,57.7 91.83,57.7 92.73,56.8 102.84,56.8 141.96,17.67 156.85,17.67
SRC  (via drill 0.3)
  Top 0.15: C4.2 90.37,28.61 89.75,28.61 87.95,26.81 D5.2 87.88,26.74 v85.39,26.74 | v66.55,11.37 66.55,10.05 Q3.3 | L1.1 76.57,31.69 v75.66,30.78
  Bottom 0.15: v66.55,11.37 66.55,21.67 v75.66,30.78 76.43,30.78 80.47,26.74 v85.39,26.74
SS_SD  (via drill 0.3)
  Top 0.15: D8.2 130.54,4.31 129.91,3.68 125.9,3.68 125.14,4.44 125,4.44 R10.1 124.93,4.51 105.12,4.51 98.68,10.95 v81.78,10.95 | v11.08,39.62 11.77,38.93 11.77,37.96 U2.4 | v6.3,87.54 5.54,88.31 J4.P2
  Bottom 0.15: v6.3,87.54 6.86,86.99 6.86,44.06 11.08,39.83 v11.08,39.62 11.08,38.52 42.94,6.66 72.3,6.66 72.64,7.01 72.64,7.28 72.09,7.84 72.09,10.61 72.44,10.95 v81.78,10.95
TX
  Top 0.15: U2.25 11.77,55.41 11.77,64.55 6.79,69.54 TP1.TP
USB_D+  (via drill 0.3)
  Top 0.15: v87.53,57.21 95.15,64.83 127.7,64.83 139.61,52.92 144.66,52.92 145.63,53.89 147.02,53.89 D1.1 | v49.17,47.24 39.89,37.96 24.52,37.96 U2.14
  Bottom 0.15: v87.53,57.21 59.14,57.21 v49.17,47.24
USB_D-  (via drill 0.3)
  Top 0.15: v87.53,56.59 95.5,64.55 127.56,64.55 140.44,51.67 144.73,51.67 145.01,51.95 147.02,51.95 D1.3 | v49.03,46.48 48.82,46.48 39.27,36.92 23.96,36.92 23.27,37.62 23.27,37.89 U2.13
  Bottom 0.15: v87.53,56.59 59.14,56.59 v49.03,46.48
VBAT
  Top 0.3: U4.2 U4.3 91.32,56.78 91.2,56.9 91.2,58.9 95.07,62.77 TP3.TP 106.87,62.77 108.3,64.2 126.81,64.2 C2_BAT.1 133.1,57.91 | 133.1,57.91 133.1,57.7 131.69,56.29 U5.3 | 133.1,57.91 134.89,56.12 Q1.3
VBUS
  Top 0.3: C1_BAT.1 117.12,56.36 CHG_LED.A | CHG_LED.A 121.71,57.3 125,57.3 126.01,56.29 U5.4 126.76,55.94 128.48,54.22 128.48,54 133.29,49.19 Q1.1 133.94,48.96 137.21,45.69 C5_USB.1 | C5_USB.1 146.81,48.14 C4_USB.1 148.57,49.9 150.1,49.9 151.6,51.4 151.6,52 150.64,52.96 D1.5 | C5_USB.1 146.81,41.61 146.42,41.22 PFMF.050.1.2 152.02,35.03 TP16.TP | CHG_LED.A 118.55,54.14 D2.2 118.05,46.21 R1_PWRUSB.2
VRTC
  Top 0.3: C10_SUPERCAP.2 94.94,51.74 94.8,51.6 89.68,51.6 C8.1 89.54,51.67 88.16,51.67 81.44,58.39 81.37,58.53 | 81.37,58.53 81.37,60.67 81.65,60.95 83.52,60.95 84.48,61.92 84.48,62.27 R_CAPACITOR.2 | 81.37,58.53 81.09,58.25 79.08,58.25 78.25,59.08 78.25,59.57 U3.14
VUSB
  Top 0.3: PFMF.050.1.1 152.62,40.63 161.3,49.3 | 161.3,49.3 163.63,51.64 164.25,51.64 J2.A4 J2.B9 | 161.3,49.3 161.3,54.1 163.63,56.44 164.25,56.44 J2.B4 J2.A9